# EAGLE board tf536 (EAGLE 9.6.2), part 1 of 2
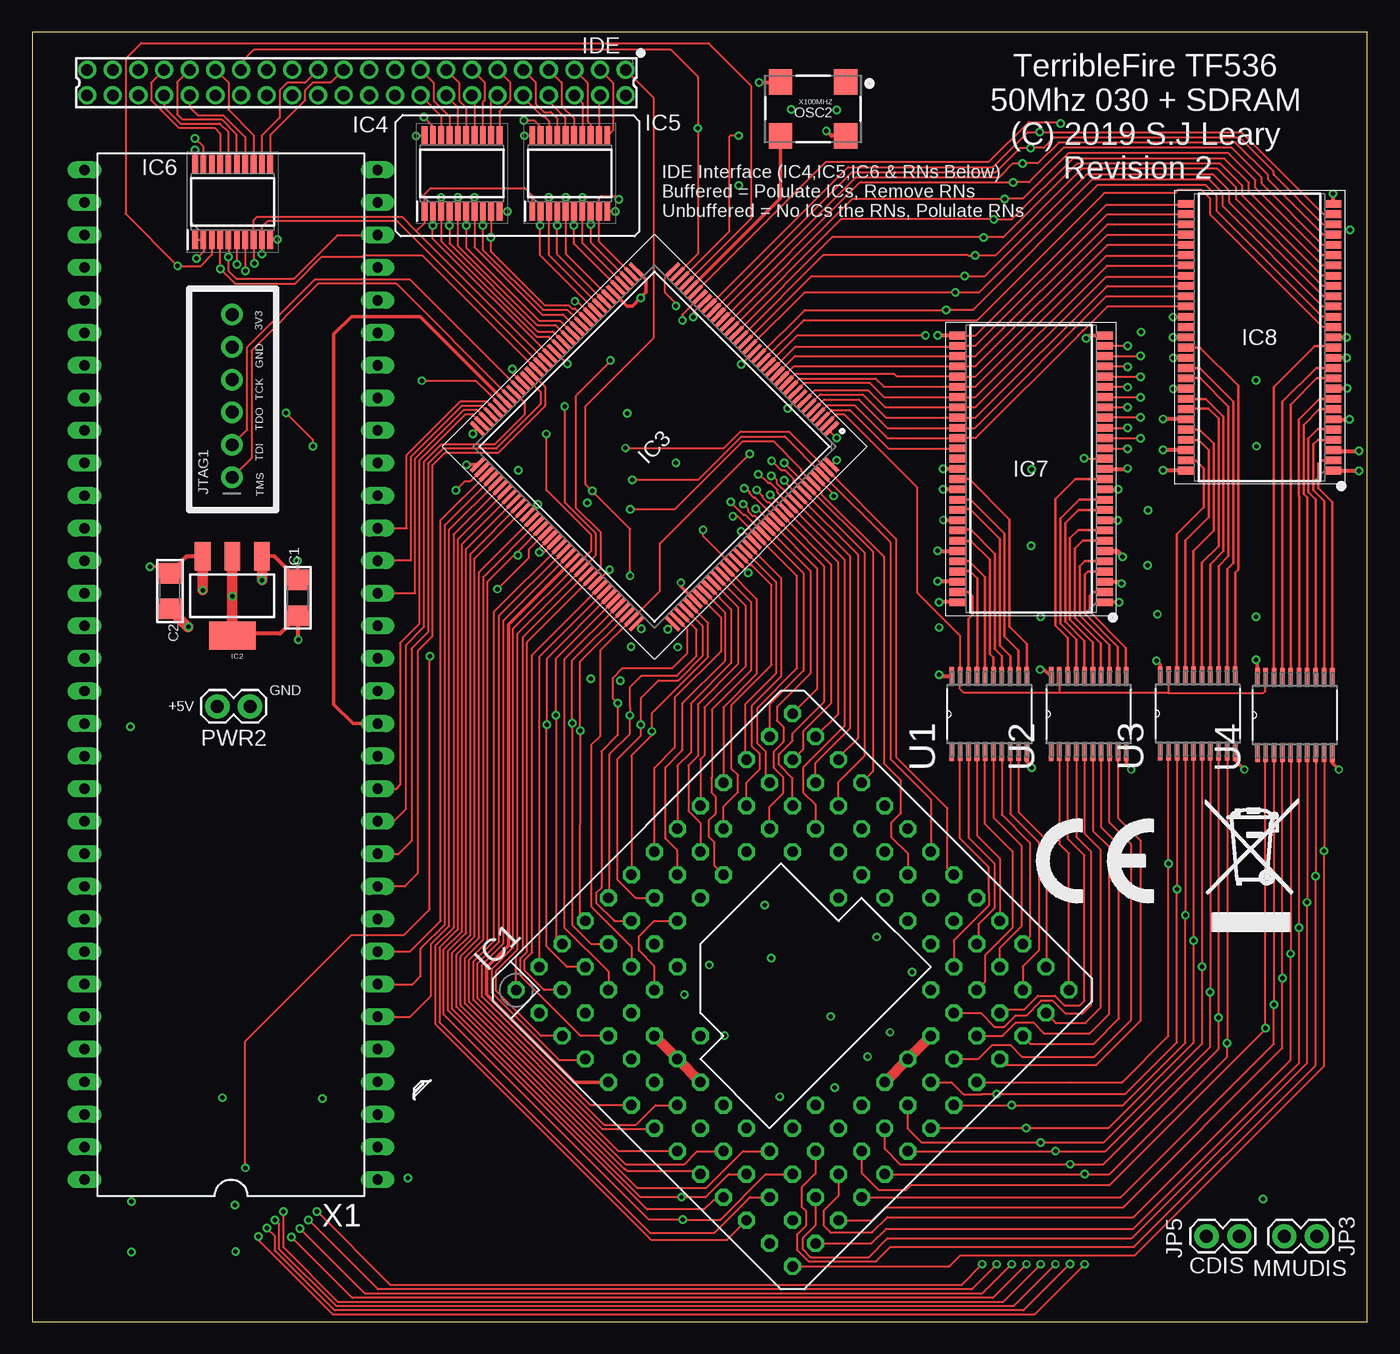
[diagram p0: board, top side]
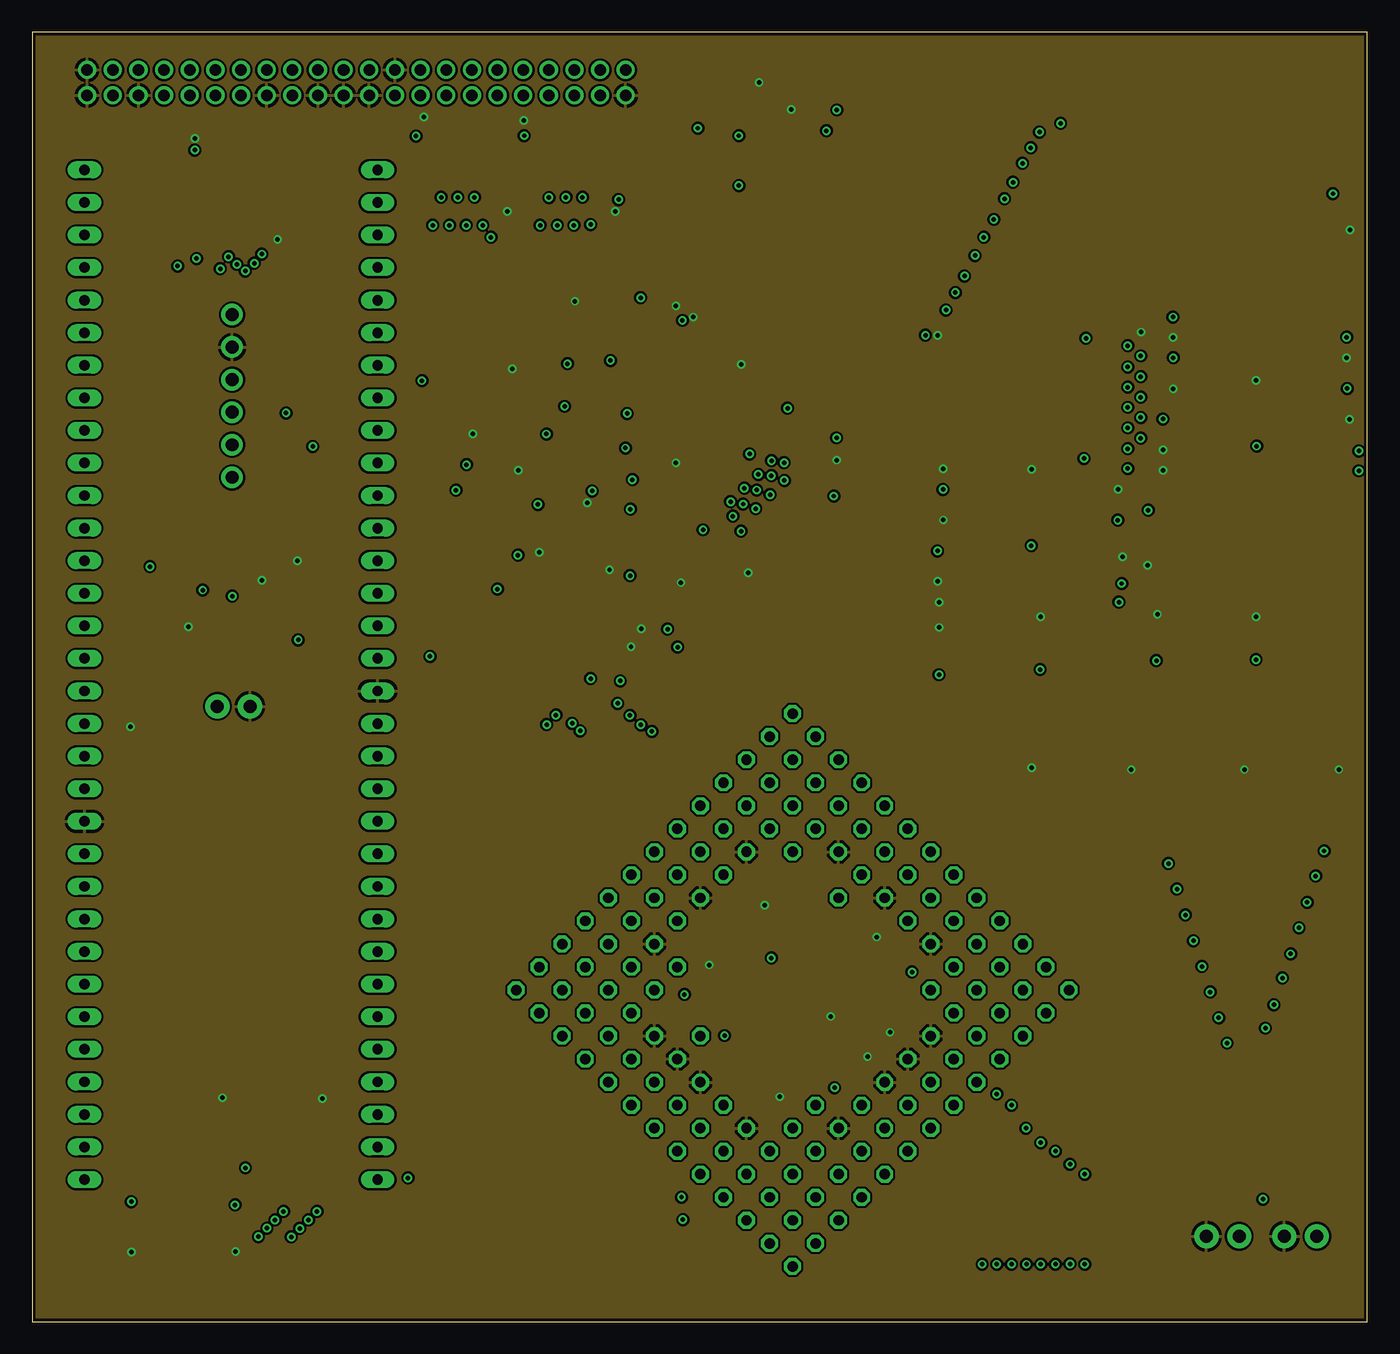
[diagram p1: board, inner layer GND]
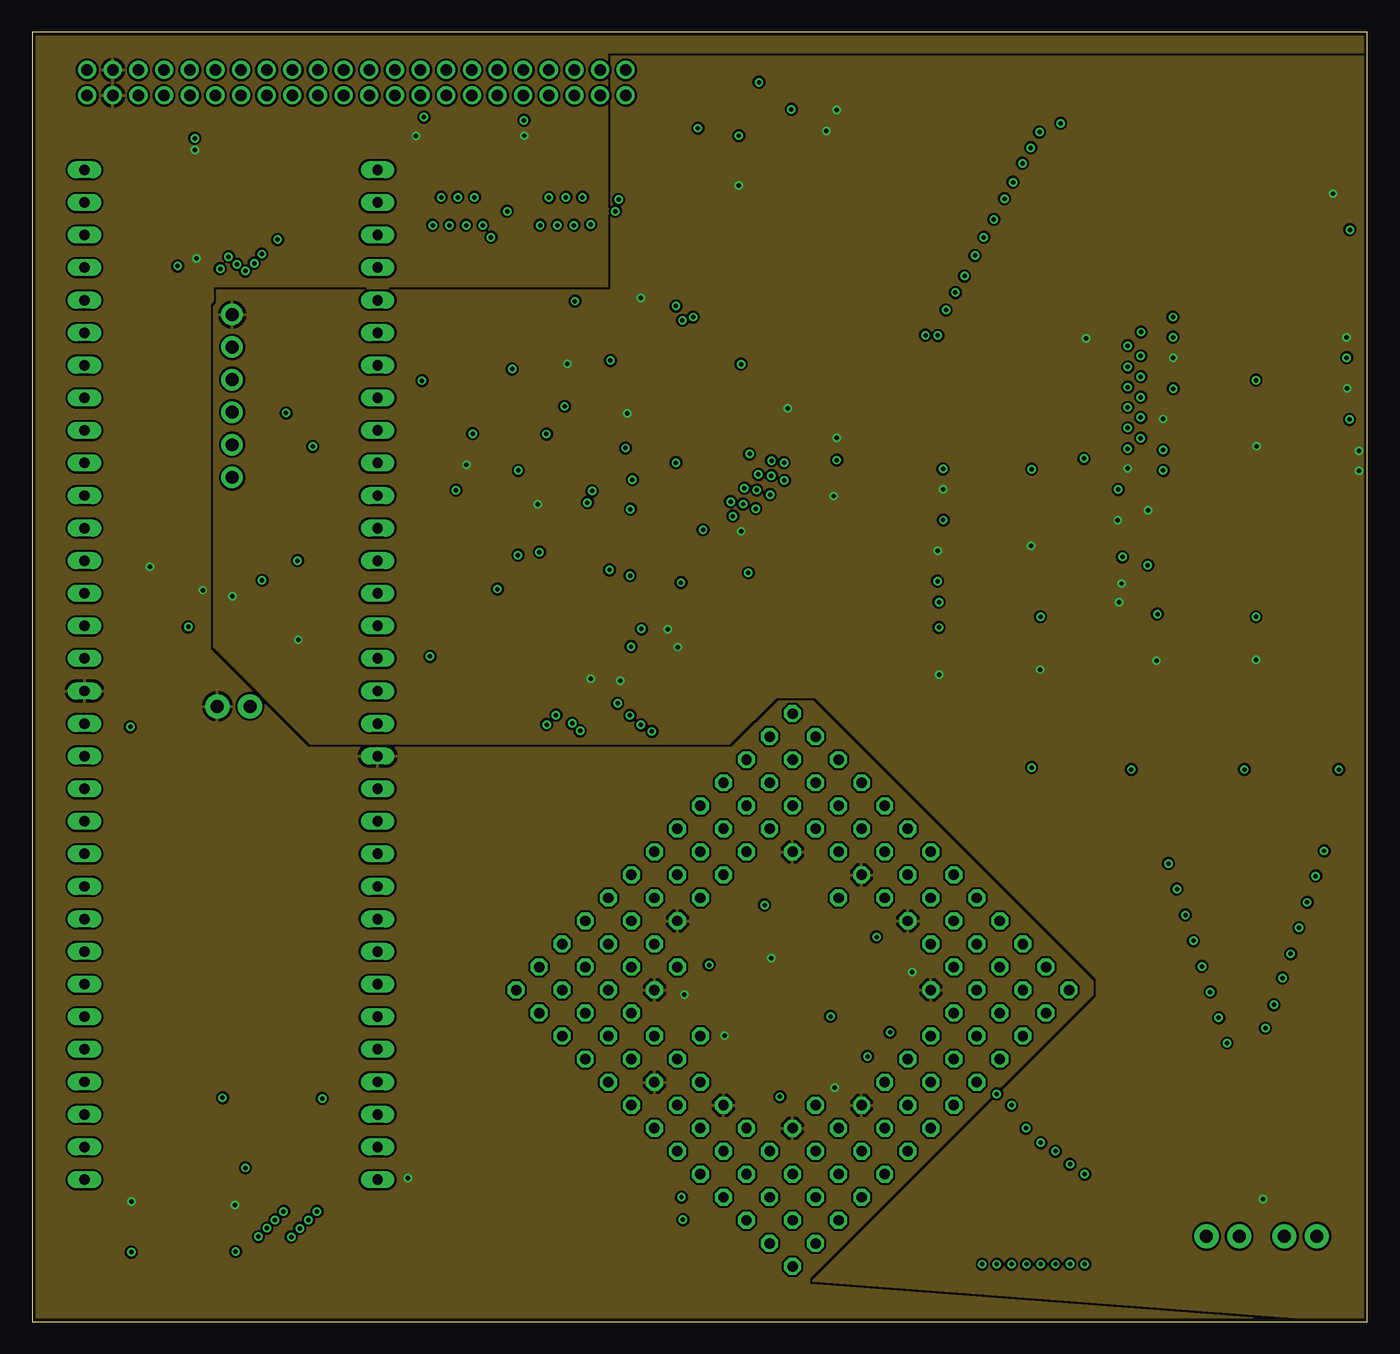
[diagram p2: board, inner layer PWR]
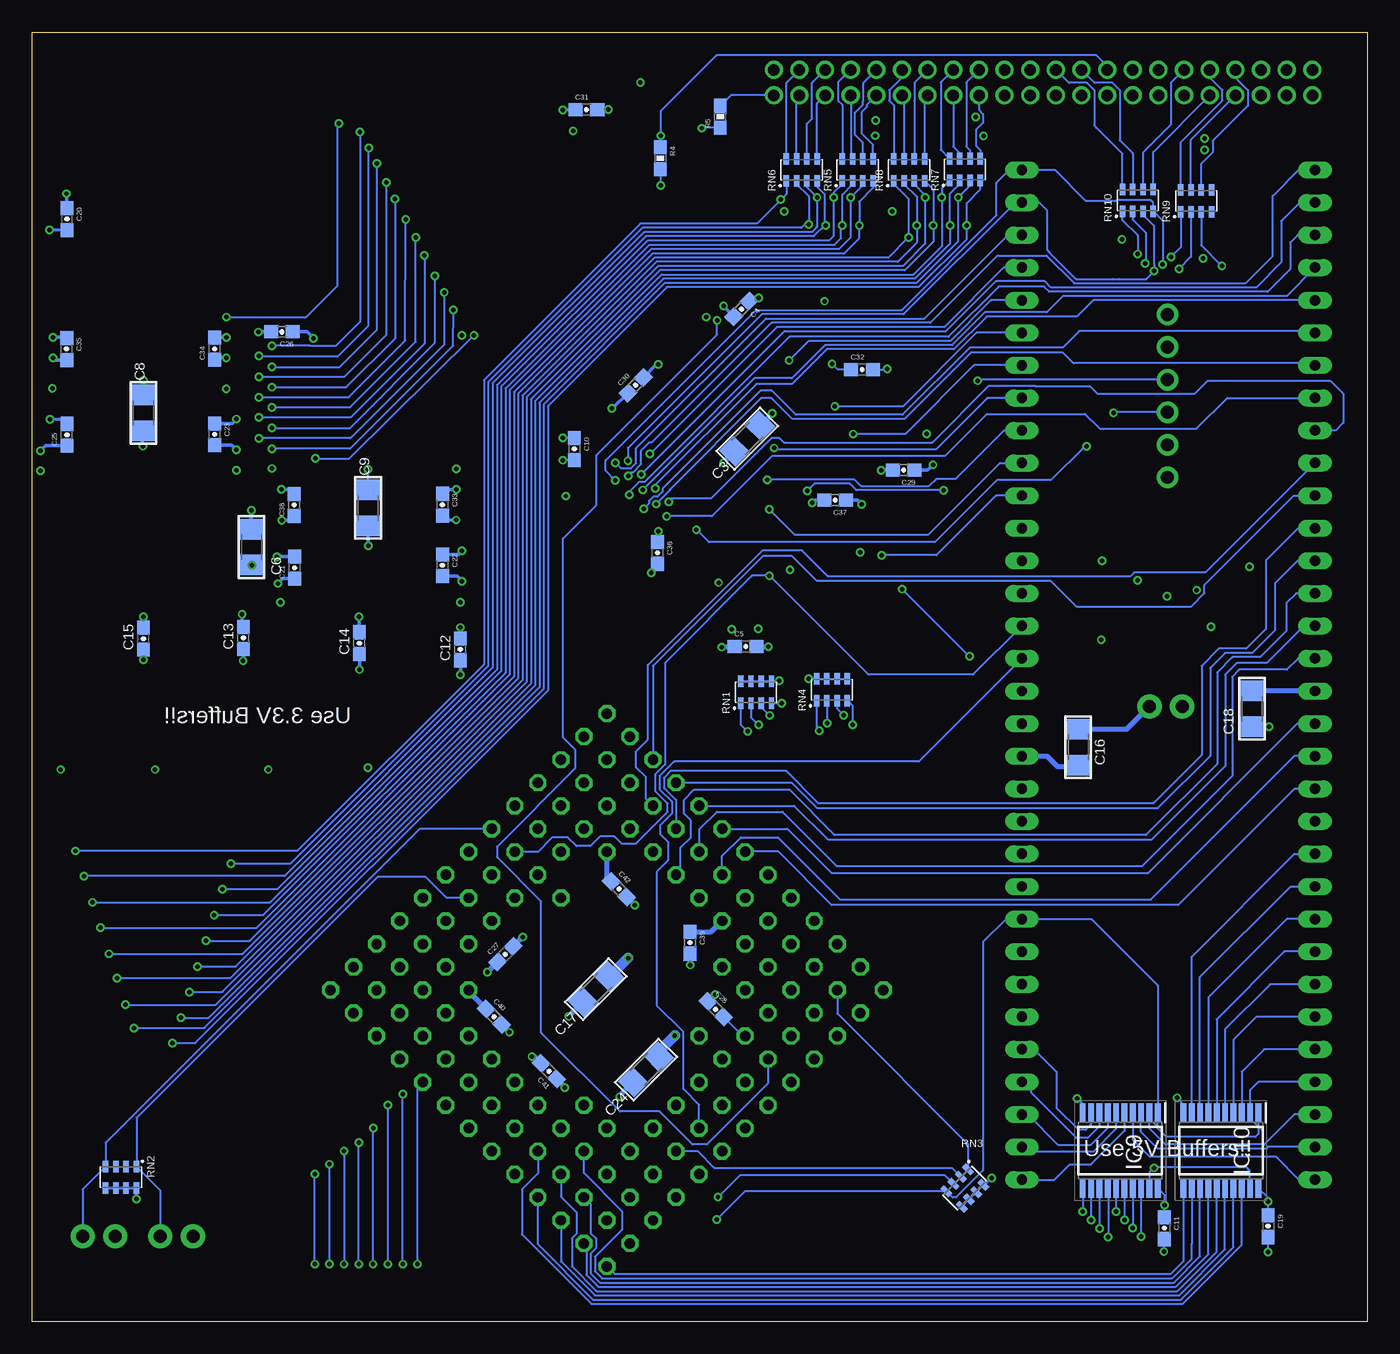
[diagram p3: board, bottom side, seen from below]

Size 104.14 x 100.56 mm. Coordinates in mm from the lower left corner, seen from the top.
Outline: 104.14,100.56 0,100.56 0,0 104.14,0 104.14,100.56
Copper layers (1*2*15*16): Top 0.035mm / dielectric 0.2mm / GND 0.0175mm / dielectric 1.2mm / PWR 0.0175mm / dielectric 0.2mm / Bottom 0.035mm
Design rules "dirtypcbs_4_layer *": minimum track width 5mil, minimum drill 12mil, track to track 7mil, track to pad 8mil, pad to pad 7mil, via to via 7mil, smd to smd 0mil, copper to edge 10mil, drill to drill 10mil, minimum pad ring 10mil, minimum via ring 6mil, stop-mask expansion 2mil, vias tented up to drill 25mil, thermal gap 10mil

## Footprints (pad centres in the part's own frame; a part is rotated, then mirrored left to right if it is on the bottom)
1206 = smd 1.6 x 1.8: 1 -1.4,0; 2 1.4,0
0603-CAP = smd 1.1 x 1: 1 -0.85,0; 2 0.85,0
MPGA128 = drill 0.813 octagon: A01 -15.24,15.24; A02 -12.7,15.24; A03 -10.16,15.24; A04 -7.62,15.24; A05 -5.08,15.24; A06 -2.54,15.24; A07 0,15.24; A08 2.54,15.24; A09 5.08,15.24; A10 7.62,15.24; A11 10.16,15.24; A12 12.7,15.24; A13 15.24,15.24; B01 -15.24,12.7; B02 -12.7,12.7; B03 -10.16,12.7; B04 -7.62,12.7; B05 -5.08,12.7; B06 -2.54,12.7; B07 0,12.7; B08 2.54,12.7; B09 5.08,12.7; B10 7.62,12.7; B11 10.16,12.7; B12 12.7,12.7; B13 15.24,12.7; C01 -15.24,10.16; C02 -12.7,10.16; C03 -10.16,10.16; C04 -7.62,10.16; C05 -5.08,10.16; C06 -2.54,10.16; C07 0,10.16; C08 2.54,10.16; C09 5.08,10.16; C10 7.62,10.16; C11 10.16,10.16; C12 12.7,10.16; C13 15.24,10.16; D01 -15.24,7.62; D02 -12.7,7.62; D03 -10.16,7.62; D04 -7.62,7.62; D05 -5.08,7.62; D10 7.62,7.62; D11 10.16,7.62; D12 12.7,7.62; D13 15.24,7.62; E01 -15.24,5.08; E02 -12.7,5.08; E03 -10.16,5.08; E11 10.16,5.08; E12 12.7,5.08; E13 15.24,5.08; F01 -15.24,2.54; F02 -12.7,2.54; F03 -10.16,2.54; F04 -7.62,2.54; F10 7.62,2.54; F11 10.16,2.54; F12 12.7,2.54; F13 15.24,2.54; G01 -15.24,0; G02 -12.7,0; G03 -10.16,0; G11 10.16,0; G12 12.7,0; G13 15.24,0; H01 -15.24,-2.54; H02 -12.7,-2.54; H03 -10.16,-2.54; H11 10.16,-2.54; H12 12.7,-2.54; H13 15.24,-2.54; J01 -15.24,-5.08; J02 -12.7,-5.08; J03 -10.16,-5.08; J11 10.16,-5.08; J12 12.7,-5.08; J13 15.24,-5.08; K01 -15.24,-7.62; K02 -12.7,-7.62; K03 -10.16,-7.62; K04 -7.62,-7.62; K05 -5.08,-7.62; K10 7.62,-7.62; K11 10.16,-7.62; K12 12.7,-7.62; K13 15.24,-7.62; L01 -15.24,-10.16; L02 -12.7,-10.16; L03 -10.16,-10.16; L04 -7.62,-10.16; L05 -5.08,-10.16; L06 -2.54,-10.16; L07 0,-10.16; L08 2.54,-10.16; L09 5.08,-10.16; L10 7.62,-10.16; L11 10.16,-10.16; L12 12.7,-10.16; L13 15.24,-10.16; M01 -15.24,-12.7; M02 -12.7,-12.7; M03 -10.16,-12.7; M04 -7.62,-12.7; M05 -5.08,-12.7; M06 -2.54,-12.7; M07 0,-12.7; M08 2.54,-12.7; M09 5.08,-12.7; M10 7.62,-12.7; M11 10.16,-12.7; M12 12.7,-12.7; M13 15.24,-12.7; N01 -15.24,-15.24; N02 -12.7,-15.24; N03 -10.16,-15.24; N04 -7.62,-15.24; N05 -5.08,-15.24; N06 -2.54,-15.24; N07 0,-15.24; N08 2.54,-15.24; N09 5.08,-15.24; N10 7.62,-15.24; N11 10.16,-15.24; N12 12.7,-15.24; N13 15.24,-15.24
SOT223 = smd 1.219 x 2.235: 1 -2.311,-3.099; 2 0,-3.099; 3 2.311,-3.099 | smd 3.6 x 2.2: 4 0,3.099
SAMACSYS_PARTS_QFP50P2200X2200X160-144N = smd 1.475 x 0.3: 1 -10.738,8.75; 2 -10.738,8.25; 3 -10.738,7.75; 4 -10.738,7.25; 5 -10.738,6.75; 6 -10.738,6.25; 7 -10.738,5.75; 8 -10.738,5.25; 9 -10.738,4.75; 10 -10.738,4.25; 11 -10.738,3.75; 12 -10.738,3.25; 13 -10.738,2.75; 14 -10.738,2.25; 15 -10.738,1.75; 16 -10.738,1.25; 17 -10.738,0.75; 18 -10.738,0.25; 19 -10.738,-0.25; 20 -10.738,-0.75; 21 -10.738,-1.25; 22 -10.738,-1.75; 23 -10.738,-2.25; 24 -10.738,-2.75; 25 -10.738,-3.25; 26 -10.738,-3.75; 27 -10.738,-4.25; 28 -10.738,-4.75; 29 -10.738,-5.25; 30 -10.738,-5.75; 31 -10.738,-6.25; 32 -10.738,-6.75; 33 -10.738,-7.25; 34 -10.738,-7.75; 35 -10.738,-8.25; 36 -10.738,-8.75; 73 10.738,-8.75; 74 10.738,-8.25; 75 10.738,-7.75; 76 10.738,-7.25; 77 10.738,-6.75; 78 10.738,-6.25; 79 10.738,-5.75; 80 10.738,-5.25; 81 10.738,-4.75; 82 10.738,-4.25; 83 10.738,-3.75; 84 10.738,-3.25; 85 10.738,-2.75; 86 10.738,-2.25; 87 10.738,-1.75; 88 10.738,-1.25; 89 10.738,-0.75; 90 10.738,-0.25; 91 10.738,0.25; 92 10.738,0.75; 93 10.738,1.25; 94 10.738,1.75; 95 10.738,2.25; 96 10.738,2.75; 97 10.738,3.25; 98 10.738,3.75; 99 10.738,4.25; 100 10.738,4.75; 101 10.738,5.25; 102 10.738,5.75; 103 10.738,6.25; 104 10.738,6.75; 105 10.738,7.25; 106 10.738,7.75; 107 10.738,8.25; 108 10.738,8.75 | smd 0.3 x 1.475: 37 -8.75,-10.738; 38 -8.25,-10.738; 39 -7.75,-10.738; 40 -7.25,-10.738; 41 -6.75,-10.738; 42 -6.25,-10.738; 43 -5.75,-10.738; 44 -5.25,-10.738; 45 -4.75,-10.738; 46 -4.25,-10.738; 47 -3.75,-10.738; 48 -3.25,-10.738; 49 -2.75,-10.738; 50 -2.25,-10.738; 51 -1.75,-10.738; 52 -1.25,-10.738; 53 -0.75,-10.738; 54 -0.25,-10.738; 55 0.25,-10.738; 56 0.75,-10.738; 57 1.25,-10.738; 58 1.75,-10.738; 59 2.25,-10.738; 60 2.75,-10.738; 61 3.25,-10.738; 62 3.75,-10.738; 63 4.25,-10.738; 64 4.75,-10.738; 65 5.25,-10.738; 66 5.75,-10.738; 67 6.25,-10.738; 68 6.75,-10.738; 69 7.25,-10.738; 70 7.75,-10.738; 71 8.25,-10.738; 72 8.75,-10.738; 109 8.75,10.738; 110 8.25,10.738; 111 7.75,10.738; 112 7.25,10.738; 113 6.75,10.738; 114 6.25,10.738; 115 5.75,10.738; 116 5.25,10.738; 117 4.75,10.738; 118 4.25,10.738; 119 3.75,10.738; 120 3.25,10.738; 121 2.75,10.738; 122 2.25,10.738; 123 1.75,10.738; 124 1.25,10.738; 125 0.75,10.738; 126 0.25,10.738; 127 -0.25,10.738; 128 -0.75,10.738; 129 -1.25,10.738; 130 -1.75,10.738; 131 -2.25,10.738; 132 -2.75,10.738; 133 -3.25,10.738; 134 -3.75,10.738; 135 -4.25,10.738; 136 -4.75,10.738; 137 -5.25,10.738; 138 -5.75,10.738; 139 -6.25,10.738; 140 -6.75,10.738; 141 -7.25,10.738; 142 -7.75,10.738; 143 -8.25,10.738; 144 -8.75,10.738
SOP65P640X110-20N = smd 1.475 x 0.45: 1 -2.938,2.925; 2 -2.938,2.275; 3 -2.938,1.625; 4 -2.938,0.975; 5 -2.938,0.325; 6 -2.938,-0.325; 7 -2.938,-0.975; 8 -2.938,-1.625; 9 -2.938,-2.275; 10 -2.938,-2.925; 11 2.938,-2.925; 12 2.938,-2.275; 13 2.938,-1.625; 14 2.938,-0.975; 15 2.938,-0.325; 16 2.938,0.325; 17 2.938,0.975; 18 2.938,1.625; 19 2.938,2.275; 20 2.938,2.925
SOP80P1176X120-54N = smd 1.295 x 0.6: 1 -5.728,10.4; 2 -5.728,9.6; 3 -5.728,8.8; 4 -5.728,8; 5 -5.728,7.2; 6 -5.728,6.4; 7 -5.728,5.6; 8 -5.728,4.8; 9 -5.728,4; 10 -5.728,3.2; 11 -5.728,2.4; 12 -5.728,1.6; 13 -5.728,0.8; 14 -5.728,0; 15 -5.728,-0.8; 16 -5.728,-1.6; 17 -5.728,-2.4; 18 -5.728,-3.2; 19 -5.728,-4; 20 -5.728,-4.8; 21 -5.728,-5.6; 22 -5.728,-6.4; 23 -5.728,-7.2; 24 -5.728,-8; 25 -5.728,-8.8; 26 -5.728,-9.6; 27 -5.728,-10.4; 28 5.728,-10.4; 29 5.728,-9.6; 30 5.728,-8.8; 31 5.728,-8; 32 5.728,-7.2; 33 5.728,-6.4; 34 5.728,-5.6; 35 5.728,-4.8; 36 5.728,-4; 37 5.728,-3.2; 38 5.728,-2.4; 39 5.728,-1.6; 40 5.728,-0.8; 41 5.728,0; 42 5.728,0.8; 43 5.728,1.6; 44 5.728,2.4; 45 5.728,3.2; 46 5.728,4; 47 5.728,4.8; 48 5.728,5.6; 49 5.728,6.4; 50 5.728,7.2; 51 5.728,8; 52 5.728,8.8; 53 5.728,9.6; 54 5.728,10.4
87758-4416 = drill 0.9 pad 1.27: 1 -21,-1; 2 -21,1; 3 -19,-1; 4 -19,1; 5 -17,-1; 6 -17,1; 7 -15,-1; 8 -15,1; 9 -13,-1; 10 -13,1; 11 -11,-1; 12 -11,1; 13 -9,-1; 14 -9,1; 15 -7,-1; 16 -7,1; 17 -5,-1; 18 -5,1; 19 -3,-1; 20 -3,1; 21 -1,-1; 22 -1,1; 23 1,-1; 24 1,1; 25 3,-1; 26 3,1; 27 5,-1; 28 5,1; 29 7,-1; 30 7,1; 31 9,-1; 32 9,1; 33 11,-1; 34 11,1; 35 13,-1; 36 13,1; 37 15,-1; 38 15,1; 39 17,-1; 40 17,1; 41 19,-1; 42 19,1; 43 21,-1; 44 21,1
1X02 = drill 1.016 pad 1.88: 1 0,0; 2 2.54,0
1X06_ROUND = drill 1 pad 1.676: 1 -6.35,0; 2 -3.81,0; 3 -1.27,0; 4 1.27,0; 5 3.81,0; 6 6.35,0
OSC_7X5MM = smd 1.8 x 2: 1 -2.54,-2.1; 2 2.54,-2.1; 3 2.54,2.1; 4 -2.54,2.1
0603 = smd 1.1 x 1: 1 -0.85,0; 2 0.85,0
RESCAXE80P320X160-8N = smd 0.9 x 0.425: 1 -0.85,1.2; 2 -0.85,0.4; 3 -0.85,-0.4; 4 -0.85,-1.2; 5 0.85,-1.2; 6 0.85,-0.4; 7 0.85,0.4; 8 0.85,1.2
SOP65P640X120-20N = smd 1.473 x 0.356: 1 -2.921,2.921; 2 -2.921,2.286; 3 -2.921,1.626; 4 -2.921,0.965; 5 -2.921,0.33; 6 -2.921,-0.33; 7 -2.921,-0.965; 8 -2.921,-1.626; 9 -2.921,-2.286; 10 -2.921,-2.921; 11 2.921,-2.921; 12 2.921,-2.286; 13 2.921,-1.626; 14 2.921,-0.965; 15 2.921,-0.33; 16 2.921,0.33; 17 2.921,0.965; 18 2.921,1.626; 19 2.921,2.286; 20 2.921,2.921
DIL64 = drill 0.813 long: 1 -39.37,-11.43; 2 -36.83,-11.43; 3 -34.29,-11.43; 4 -31.75,-11.43; 5 -29.21,-11.43; 6 -26.67,-11.43; 7 -24.13,-11.43; 8 -21.59,-11.43; 9 -19.05,-11.43; 10 -16.51,-11.43; 11 -13.97,-11.43; 12 -11.43,-11.43; 13 -8.89,-11.43; 14 -6.35,-11.43; 15 -3.81,-11.43; 16 -1.27,-11.43; 17 1.27,-11.43; 18 3.81,-11.43; 19 6.35,-11.43; 20 8.89,-11.43; 21 11.43,-11.43; 22 13.97,-11.43; 23 16.51,-11.43; 24 19.05,-11.43; 25 21.59,-11.43; 26 24.13,-11.43; 27 26.67,-11.43; 28 29.21,-11.43; 29 31.75,-11.43; 30 34.29,-11.43; 31 36.83,-11.43; 32 39.37,-11.43; 33 39.37,11.43; 34 36.83,11.43; 35 34.29,11.43; 36 31.75,11.43; 37 29.21,11.43; 38 26.67,11.43; 39 24.13,11.43; 40 21.59,11.43; 41 19.05,11.43; 42 16.51,11.43; 43 13.97,11.43; 44 11.43,11.43; 45 8.89,11.43; 46 6.35,11.43; 47 3.81,11.43; 48 1.27,11.43; 49 -1.27,11.43; 50 -3.81,11.43; 51 -6.35,11.43; 52 -8.89,11.43; 53 -11.43,11.43; 54 -13.97,11.43; 55 -16.51,11.43; 56 -19.05,11.43; 57 -21.59,11.43; 58 -24.13,11.43; 59 -26.67,11.43; 60 -29.21,11.43; 61 -31.75,11.43; 62 -34.29,11.43; 63 -36.83,11.43; 64 -39.37,11.43

## Placement (x,y rotation side)
C1  10uF  [1206]  20.73,56.44 90 top
C2  10uF  [1206]  10.74,56.97 270 top
C3  1uF  [1206]  48.36,68.86 225 bottom
C4  0.1uF  [0603-CAP]  48.82,78.97 225 bottom
C5  0.1uF  [0603-CAP]  48.49,52.65 0 bottom
C6  10uF  [1206]  87.02,60.4 270 bottom
C8  1uF  [1206]  95.45,70.87 90 bottom
C9  1uF  [1206]  77.93,63.45 90 bottom
C10  0.1uF  [0603-CAP]  61.85,68.05 270 bottom
C11  0.1uF  [0603-CAP]  15.85,7.29 270 bottom
C12  0.1uF  [0603-CAP]  70.74,52.43 90 bottom
C13  0.1uF  [0603-CAP]  87.66,53.31 90 bottom
C14  0.1uF  [0603-CAP]  78.61,52.91 90 bottom
C15  0.1uF  [0603-CAP]  95.45,53.26 90 bottom
C16  22uF  [1206]  22.56,44.81 90 bottom
C17  10uF  [1206]  60.17,25.93 225 bottom
C18  22uF  [1206]  8.99,47.78 270 bottom
C19  0.1uF  [0603-CAP]  7.75,7.44 270 bottom
C20  0.1uF  [0603-CAP]  101.42,85.98 270 bottom
C21  0.1uF  [0603-CAP]  83.67,58.8 90 bottom
C22  0.1uF  [0603-CAP]  72.14,58.98 270 bottom
C23  0.1uF  [0603-CAP]  89.89,69.19 270 bottom
C24  1uF  [1206]  56.26,19.66 225 bottom
C25  0.1uF  [0603-CAP]  101.42,69.16 90 bottom
C26  0.1uF  [0603-CAP]  84.66,77.19 180 bottom
C27  0.1uF  [0603-CAP]  67.23,28.65 45 bottom
C28  0.1uF  [0603-CAP]  50.83,24.36 315 bottom
C29  0.1uF  [0603-CAP]  36.17,66.4 180 bottom
C30  0.1uF  [0603-CAP]  57.07,73.03 45 bottom
C31  0.1uF  [0603-CAP]  60.91,94.51 0 bottom
C32  0.1uF  [0603-CAP]  39.42,74.24 0 bottom
C33  0.1uF  [0603-CAP]  72.14,63.7 270 bottom
C34  0.1uF  [0603-CAP]  89.89,75.87 90 bottom
C35  0.1uF  [0603-CAP]  101.45,75.84 270 bottom
C36  0.1uF  [0603-CAP]  55.37,59.94 270 bottom
C37  0.1uF  [0603-CAP]  41.5,64.06 180 bottom
C38  0.1uF  [0603-CAP]  83.69,63.68 90 bottom
C39  0.1uF  [0603-CAP]  52.83,29.54 270 bottom
C40  0.1uF  [0603-CAP]  68.12,23.77 315 bottom
C41  0.1uF  [0603-CAP]  63.83,19.53 135 bottom
C42  0.1uF  [0603-CAP]  58.37,33.73 315 bottom
IC1  MC68030  [MPGA128]  59.31,25.86 45 top
IC2  LM1117-3.3  [SOT223]  15.62,56.59 180 top
IC3  XC95288XL-10TQG144I  [SAMACSYS_PARTS_QFP50P2200X2200X160-144N]  48.54,68.22 225 top
IC4  74VHC245PW,118  [SOP65P640X110-20N]  33.53,89.53 90 top
IC5  74VHC245PW,118  [SOP65P640X110-20N]  41.94,89.53 90 top
IC6  74VHC245PW,118  [SOP65P640X110-20N]  15.65,87.3 90 top
IC7  MT48LC16M16A2P-6A_G  [SOP80P1176X120-54N]  77.9,66.5 180 top
IC8  MT48LC16M16A2P-6A_G  [SOP80P1176X120-54N]  95.73,76.76 180 top
IC9  74VHC245PW,118  [SOP65P640X110-20N]  19.28,13.34 270 bottom
IC10  74VHC245PW,118  [SOP65P640X110-20N]  11.43,13.34 270 bottom
IDE  87758-4416  [87758-4416]  25.3,96.62 180 top
JP3  MMUDIS  [1X02]  97.66,6.65 0 top
JP5  CDIS  [1X02]  91.59,6.65 0 top
JTAG1  JTAG  [1X06_ROUND]  15.6,72.19 90 top
OSC2  X100MHZ  [OSC_7X5MM]  60.91,94.56 180 top
PWR2  EXT5V  [1X02]  16.99,47.98 180 top
R4  1K  [0603]  55.14,90.73 270 bottom
R5  1K  [0603]  50.47,93.95 90 bottom
RN1  2K2  [RESCAXE80P320X160-8N]  47.68,49.07 90 bottom
RN2  CAY16-222J4LF  [RESCAXE80P320X160-8N]  97.21,11.25 270 bottom
RN3  CAY16-222J4LF  [RESCAXE80P320X160-8N]  31.39,10.41 315 bottom
RN4  2K2  [RESCAXE80P320X160-8N]  41.76,49.28 90 bottom
RN5  0  [RESCAXE80P320X160-8N]  39.75,89.81 90 bottom
RN6  0  [RESCAXE80P320X160-8N]  44.12,89.81 90 bottom
RN7  0  [RESCAXE80P320X160-8N]  31.39,89.84 90 bottom
RN8  0  [RESCAXE80P320X160-8N]  35.74,89.81 90 bottom
RN9  0  [RESCAXE80P320X160-8N]  13.36,87.4 90 bottom
RN10  0  [RESCAXE80P320X160-8N]  17.91,87.43 90 bottom
U1  SN74CB3T3245PW  [SOP65P640X120-20N]  74.65,47.37 90 top
U2  SN74CB3T3245PW  [SOP65P640X120-20N]  82.4,47.37 90 top
U3  SN74CB3T3245PW  [SOP65P640X120-20N]  90.91,47.42 90 top
U4  SN74CB3T3245PW  [SOP65P640X120-20N]  98.48,47.29 90 top
X1  MC68000  [DIL64]  15.52,50.44 90 top

## Library data of the parts
C1-C3 C6 C8 C9 C16-C18 C24 JTAG1 OSC2 = microbuilder
C4 C5 C10-C15 C19-C23 C25-C42 = SparkFun-Capacitors; PROD_ID: CAP-00810
IC1 = micro-mc68000; MF: MOTOROLA; MPN: MC68030RC50C; OC_FARNELL: unknown; OC_NEWARK: 52F3269
IC2 = SparkFun-PowerIC; PROD_ID: VREG-08170
IC3 = sjl540; DESCRIPTION: XC95144XL-10TQG144I XC95144XL-10TQG144I, CPLD XC9500XL Flash 144 Cells, 117 I/O, 8 Labs, ISP, 3 3.6 V 144-Pin TQFP; HEIGHT: 1.6mm; MANUFACTURER_NAME: XILINX; MANUFACTURER_PART_NUMBER: XC95144XL-10TQG144I; RS_PART_NUMBER: 6260624; SUPPLIER_NAME: RS
IC4-IC6 IC9 IC10 = 74VHC245PW_118; DESCRIPTION: 74VHC(T)245 - Octal bus transceiver; 3-state@en-us; HEIGHT: 1.1mm; MANUFACTURER_NAME: Nexperia; MANUFACTURER_PART_NUMBER: 74VHC245PW,118; MOUSER_PART_NUMBER: 771-74VHC245PW118; MOUSER_PRICE-STOCK: https://www.mouser.com/Search/Refine.aspx?Keyword=771-74VHC245PW118
IC7 IC8 = SamacSys_Parts; DESCRIPTION: MT48LC16M16A2P-6A:G, SDRAM Memory 256mb Surface Mount, 3 3.6 V, 0 +70 C, 54-pin, TSOP; HEIGHT: 1.2mm; MANUFACTURER_NAME: Micron; MANUFACTURER_PART_NUMBER: MT48LC16M16A2P-6A:G; RS_PART_NUMBER: 7824553; SUPPLIER_NAME: RS
IDE = Hermes_development; MF: MOLEX; MPN: 87758-4416; OC_FARNELL: unknown; OC_NEWARK: 59J1588
JP3 JP5 PWR2 = SparkFun-Retired
R4 R5 = SparkFun-Resistors; PROD_ID: RES-12535
RN1-RN10 = CAY16-103J4LF; AVAILABILITY: Good; DESCRIPTION: Res Thick Film Array 10K Ohm 5% ?200ppm/C ISOL Molded 8-Pin 1206(4 X 0603) Convex SMD Paper T/R; MF: Bourns; MP: CAY16-103J4LF; PACKAGE: 1206 Bourns; PRICE: 0.02 USD
U1-U4 = SN74CB3T3245PW; AVAILABILITY: Unavailable; DESCRIPTION: 8-Bit FET 2.5-V/3.3-V Low-Voltage Bus Switch With 5-V Tolerant Level Shifter 20-TSSOP -40 to 85; MF: Texas Instruments; MP: SN74CB3T3245PW; PACKAGE: TSSOP-20 Texas Instruments; PRICE: None
X1 = terriblefire; OC_FARNELL: unknown; OC_NEWARK: unknown

## Nets
A0: IC1.A02 IC3.101
A1: IC1.C04 IC3.107 X1.29
A2: IC1.D13 IC3.139 IC6.5 RN9.1 X1.30
A3: IC1.D12 IC3.138 IC6.7 RN10.3 X1.31
A4: IC1.C13 IC3.137 IC6.6 RN10.4 X1.32
A5: IC1.C12 IC3.136 X1.33
A6: IC1.D11 IC3.135 X1.34
A7: IC1.B13 IC3.134 X1.35
A8: IC1.B12 IC3.133 X1.36
A9: IC1.C11 IC3.132 X1.37
A10: IC1.A13 IC3.131 X1.38
A11: IC1.C10 IC3.130 X1.39
A12: IC1.B11 IC3.128 X1.40
A13: IC1.A12 IC3.129 X1.41
A14: IC1.B10 IC3.126 X1.42
A15: IC1.A11 IC3.125 X1.43
A16: IC1.B09 IC3.124 X1.44
A17: IC1.A10 IC3.121 X1.45
A18: IC1.C08 IC3.120 X1.46
A19: IC1.A09 IC3.119 X1.47
A20: IC1.B08 IC3.118 X1.48
A21: IC1.A08 IC3.117 X1.50
A22: IC1.B07 IC3.116 X1.51
A23: IC1.A07 IC3.115 X1.52
A24: IC1.A06 IC3.113 RN1.1
A25: IC1.B06 IC3.112 RN1.2
A26: IC1.A05 IC3.111 RN1.3
A27: IC1.B05 IC3.110 RN1.4
A28: IC1.A04 IC3.106 RN4.1
A29: IC1.B04 IC3.105 RN4.2
A30: IC1.A03 IC3.103 RN4.3
A31: IC1.B03 IC3.102 RN4.4
A_BUF2: IC6.15 IDE.35 RN9.8
A_BUF3: IC6.13 IDE.33 RN10.6
A_BUF4: IC6.14 IDE.36 RN10.5
ARAM0: IC3.25 IC7.23 IC8.23
ARAM1: IC3.26 IC7.24 IC8.24
ARAM2: IC3.27 IC7.25 IC8.25
ARAM3: IC3.28 IC7.26 IC8.26
ARAM4: IC3.14 IC7.29 IC8.29
ARAM5: IC3.13 IC7.30 IC8.30
ARAM6: IC3.12 IC7.31 IC8.31
ARAM7: IC3.11 IC7.32 IC8.32
ARAM8: IC3.10 IC7.33 IC8.33
ARAM9: IC3.9 IC7.34 IC8.34
ARAM10: IC3.24 IC7.22 IC8.22
ARAM11: IC3.7 IC7.35 IC8.35
ARAM12: IC3.6 IC7.36 IC8.36
AS: IC3.77 X1.6
AS30: IC1.J02 IC3.86 RN3.2
AVEC: IC1.E02 IC3.30
BA0: IC3.23 IC7.21 IC8.21
BA1: IC3.22 IC7.20 IC8.20
BERR: IC1.H01 IC3.87 X1.22
BG: IC3.61 X1.11
BG30: IC1.B02 IC3.100 RN3.1
BGACK: IC3.64 X1.12
BGACK30: IC1.C03 IC3.104
BR: IC3.71 X1.13
BR30: IC1.A01 IC3.97
BUSEN: IC3.88 IC9.19 IC10.19
CAS: IC3.19 IC7.17 IC8.17
CBACK: IC1.J01 IC3.85
CBREQ: IC1.K01 IC3.81
CDIS: IC1.H12 JP5.2 RN2.1
CIIN: IC1.L01 IC3.78
CIIOUT: IC1.C02
CLK7M_RAW: IC3.66 X1.15
CLK100M: IC3.32 OSC2.3
CLKCPU: IC1.E01 IC3.94
CLKRAM: IC3.4 IC7.38 IC8.38
CLKRAME: IC3.5 IC7.37 IC8.37
D0: IC1.K13 U1.4
D1: IC1.K12 U1.3
D2: IC1.L13 U1.7
D3: IC1.M13 U1.9
D4: IC1.L12 U1.6
D5: IC1.K11 U1.2
D6: IC1.M12 U1.8
D7: IC1.L11 U1.5
D8: IC1.N13 U2.2
D9: IC1.M11 U2.3
D10: IC1.L10 U2.4
D11: IC1.N12 U2.5
D12: IC1.M10 U2.6
D13: IC1.N11 U2.7
D14: IC1.M09 U2.8
D15: IC1.N10 U2.9
D16: IC1.N09 IC3.39 IC5.8 IC9.11 RN6.2 U3.2
D17: IC1.M08 IC3.41 IC5.6 IC9.12 RN6.4 U3.3
D18: IC1.N08 IC3.44 IC5.4 IC9.13 RN5.2 U3.4
D19: IC1.N07 IC3.46 IC5.2 IC9.14 RN5.4 U3.5
D20: IC1.M07 IC3.49 IC4.8 IC9.15 RN8.2 U3.6
D21: IC1.N06 IC3.51 IC4.6 IC9.16 RN8.4 U3.7
D22: IC1.M06 IC3.53 IC4.4 IC9.17 RN7.2 U3.8
D23: IC1.N05 IC3.56 IC4.2 IC9.18 RN7.4 U3.9
D24: IC1.M05 IC3.54 IC4.3 IC10.18 RN7.3 U4.2
D25: IC1.N04 IC3.52 IC4.5 IC10.17 RN7.1 U4.3
D26: IC1.N03 IC3.50 IC4.7 IC10.16 RN8.3 U4.4
D27: IC1.M04 IC3.48 IC4.9 IC10.15 RN8.1 U4.5
D28: IC1.N02 IC3.45 IC5.3 IC10.14 RN5.3 U4.6
D29: IC1.M03 IC3.43 IC5.5 IC10.13 RN5.1 U4.7
D30: IC1.L04 IC3.40 IC5.7 IC10.12 RN6.3 U4.8
D31: IC1.N01 IC3.38 IC5.9 IC10.11 RN6.1 U4.9
D68K0: IC9.9 X1.5
D68K1: IC9.8 X1.4
D68K2: IC9.7 X1.3
D68K3: IC9.6 X1.2
D68K4: IC9.5 X1.1
D68K5: IC9.4 X1.64
D68K6: IC9.3 X1.63
D68K7: IC9.2 X1.62
D68K8: IC10.2 X1.61
D68K9: IC10.3 X1.60
D68K10: IC10.4 X1.59
D68K11: IC10.5 X1.58
D68K12: IC10.6 X1.57
D68K13: IC10.7 X1.56
D68K14: IC10.8 X1.55
D68K15: IC10.9 X1.54
DBEN: IC1.M01
DIDE0: IC5.12 IDE.4 RN6.7
DIDE1: IC5.14 IDE.6 RN6.5
DIDE2: IC5.16 IDE.8 RN5.7
DIDE3: IC5.18 IDE.10 RN5.5
DIDE4: IC4.12 IDE.12 RN8.7
DIDE5: IC4.14 IDE.14 RN8.5
DIDE6: IC4.16 IDE.16 RN7.7
DIDE7: IC4.18 IDE.18 RN7.5
DIDE8: IC4.17 IDE.17 RN7.6
DIDE9: IC4.15 IDE.15 RN7.8
DIDE10: IC4.13 IDE.13 RN8.6
DIDE11: IC4.11 IDE.11 RN8.8
DIDE12: IC5.17 IDE.9 RN5.6
DIDE13: IC5.15 IDE.7 RN5.8
DIDE14: IC5.13 IDE.5 RN6.6
DIDE15: IC5.11 IDE.3 RN6.8
DQM0: IC3.3 IC7.39
DQM1: IC3.15 IC7.15
DQM2: IC3.31 IC8.39
DQM3: IC3.16 IC8.15
DRAM0: IC8.2 U4.11
DRAM1: IC8.4 U4.12
DRAM2: IC8.5 U4.13
DRAM3: IC8.7 U4.14
DRAM4: IC8.8 U4.15
DRAM5: IC8.10 U4.16
DRAM6: IC8.11 U4.17
DRAM7: IC8.13 U4.18
DRAM8: IC8.42 U3.11
DRAM9: IC8.44 U3.12
DRAM10: IC8.45 U3.13
DRAM11: IC8.47 U3.14
DRAM12: IC8.48 U3.15
DRAM13: IC8.50 U3.16
DRAM14: IC8.51 U3.17
DRAM15: IC8.53 U3.18
DRAM16: IC7.2 U2.11
DRAM17: IC7.4 U2.12
DRAM18: IC7.5 U2.13
DRAM19: IC7.7 U2.14
DRAM20: IC7.8 U2.15
DRAM21: IC7.10 U2.16
DRAM22: IC7.11 U2.17
DRAM23: IC7.13 U2.18
DRAM24: IC7.42 U1.11
DRAM25: IC7.44 U1.12
DRAM26: IC7.45 U1.13
DRAM27: IC7.47 U1.14
DRAM28: IC7.48 U1.15
DRAM29: IC7.50 U1.16
DRAM30: IC7.51 U1.17
DRAM31: IC7.53 U1.18
DS30: IC1.K02 IC3.82 RN3.3
DSACK0: IC1.F01 IC3.93
DSACK1: IC1.G02 IC3.92
DTACK: IC3.60 X1.10
E: IC3.69 X1.20
FC0: IC1.D02 IC3.98 X1.28
FC1: IC1.C01 IC3.96 X1.27
FC2: IC1.D01 IC3.95 X1.26
GND: C1.2 C2.2 C3.2 C4.2 C5.2 C6.2 C8.2 C9.2 C10.2 C11.2 C12.2 C13.2 C14.2 C15.2 C16.2 C17.2 C18.2 C19.2 C20.2 C21.2 C22.2 C23.2 C24.2 C25.2 C26.2 C27.2 C28.2 C29.2 C30.2 C31.2 C32.2 C33.2 C34.2 C35.2 C36.2 C37.2 C38.2 C39.2 C40.2 C41.2 C42.2 IC1.C05 IC1.C07 IC1.C09 IC1.E03 IC1.E11 IC1.F03 IC1.G03 IC1.G11 IC1.J03 IC1.J11 IC1.L05 IC1.L07 IC1.L08 IC1.L09 IC2.1 IC3.18 IC3.29 IC3.36 IC3.47 IC3.62 IC3.72 IC3.89 IC3.90 IC3.99 IC3.108 IC3.114 IC3.123 IC3.144 IC4.10 IC4.19 IC5.10 IC5.19 IC6.10 IC6.19 IC7.6 IC7.12 IC7.28 IC7.41 IC7.46 IC7.52 IC7.54 IC8.6 IC8.12 IC8.28 IC8.41 IC8.46 IC8.52 IC8.54 IC9.10 IC10.10 IDE.2 IDE.19 IDE.22 IDE.24 IDE.26 IDE.30 IDE.40 IDE.43 IDE.44 JP3.1 JP5.1 JTAG1.5 OSC2.2 PWR2.1 R5.2 U1.10 U2.10 U3.10 U4.10 X1.16 X1.53
HALT: IC1.H02 X1.17
IDECS0: IC3.33 IC6.3 RN9.3
IDECS1: IC3.59 IC6.4 RN9.2
IDECS_BUF0: IC6.17 IDE.37 RN9.6
IDECS_BUF1: IC6.16 IDE.38 RN9.7
IDEINT: IC3.35 IDE.31 R5.1
IDELED: IDE.39
IDEWAIT: IC3.34 IDE.27 R4.1
IOR: IC3.57 IC4.1 IC5.1 IC6.8 RN10.2
IOR_BUF: IC6.12 IDE.25 RN10.7
IOW: IC3.58 IC6.9 RN10.1
IOW_BUF: IC6.11 IDE.23 RN10.8
IPL0: IC1.H13 IC3.143 X1.25
IPL1: IC1.G13 IC3.142 X1.24
IPL2: IC1.G12 IC3.140 X1.23
LDS: IC3.75 X1.8
MMUDIS: IC1.F13 JP3.2 RN2.4
RAMCS: IC3.21 IC7.19 IC8.19
RAMOE: IC3.2 U1.19 U2.19 U3.19 U4.19
RAMWE: IC3.17 IC7.16 IC8.16
RAS: IC3.20 IC7.18 IC8.18
REFILL: IC1.J13
RESET: IC1.F12 IC3.74 IDE.1 X1.18
RW30: IC1.L03 IC3.80 IC9.1 IC10.1 RN3.4 X1.9
SIZ0: IC1.L02 IC3.79
SIZ1: IC1.K03 IC3.83
STATUS: IC1.J12
STERM: IC1.G01 IC3.91
TCK: IC3.67 JTAG1.4
TDI: IC3.63 JTAG1.2
TDO: IC3.122 JTAG1.3
TMS: IC3.65 JTAG1.1
UDS: IC3.76 X1.7
VCC: C2.1 C11.1 C16.1 C17.1 C18.1 C19.1 C24.1 C27.1 C28.1 C39.1 C40.1 C41.1 C42.1 IC1.C06 IC1.D04 IC1.D10 IC1.F02 IC1.F11 IC1.H03 IC1.H11 IC1.K04 IC1.K10 IC1.L06 IC2.3 IC4.20 IC5.20 IC6.1 IC6.2 IC6.20 IC9.20 IC10.20 IDE.41 IDE.42 PWR2.2 RN3.5 RN3.6 RN3.7 RN3.8 X1.14 X1.49
VCC33: C1.1 C3.1 C4.1 C5.1 C6.1 C8.1 C9.1 C10.1 C12.1 C13.1 C14.1 C15.1 C20.1 C21.1 C22.1 C23.1 C25.1 C26.1 C29.1 C30.1 C31.1 C32.1 C33.1 C34.1 C35.1 C36.1 C37.1 C38.1 IC2.2 IC2.4 IC3.1 IC3.8 IC3.37 IC3.42 IC3.55 IC3.73 IC3.84 IC3.109 IC3.127 IC3.141 IC7.1 IC7.3 IC7.9 IC7.14 IC7.27 IC7.43 IC7.49 IC8.1 IC8.3 IC8.9 IC8.14 IC8.27 IC8.43 IC8.49 JTAG1.6 OSC2.4 R4.2 RN1.5 RN1.6 RN1.7 RN1.8 RN2.5 RN2.6 RN2.7 RN2.8 RN4.5 RN4.6 RN4.7 RN4.8 U1.20 U2.20 U3.20 U4.20
VMA: IC3.70 X1.19
VPA: IC3.68 X1.21